# Altium PCB UltraSonicTestHarnessBoard.PcbDoc
Units mil, origin at the board's own origin, x right, y up, seen from the top; angles counter-clockwise.
Board outline 2704.96 x 3392.8 mil, 2 copper layers (Top Layer, Bottom Layer); 57 components, 26 nets, 86 pads, 77 vias.
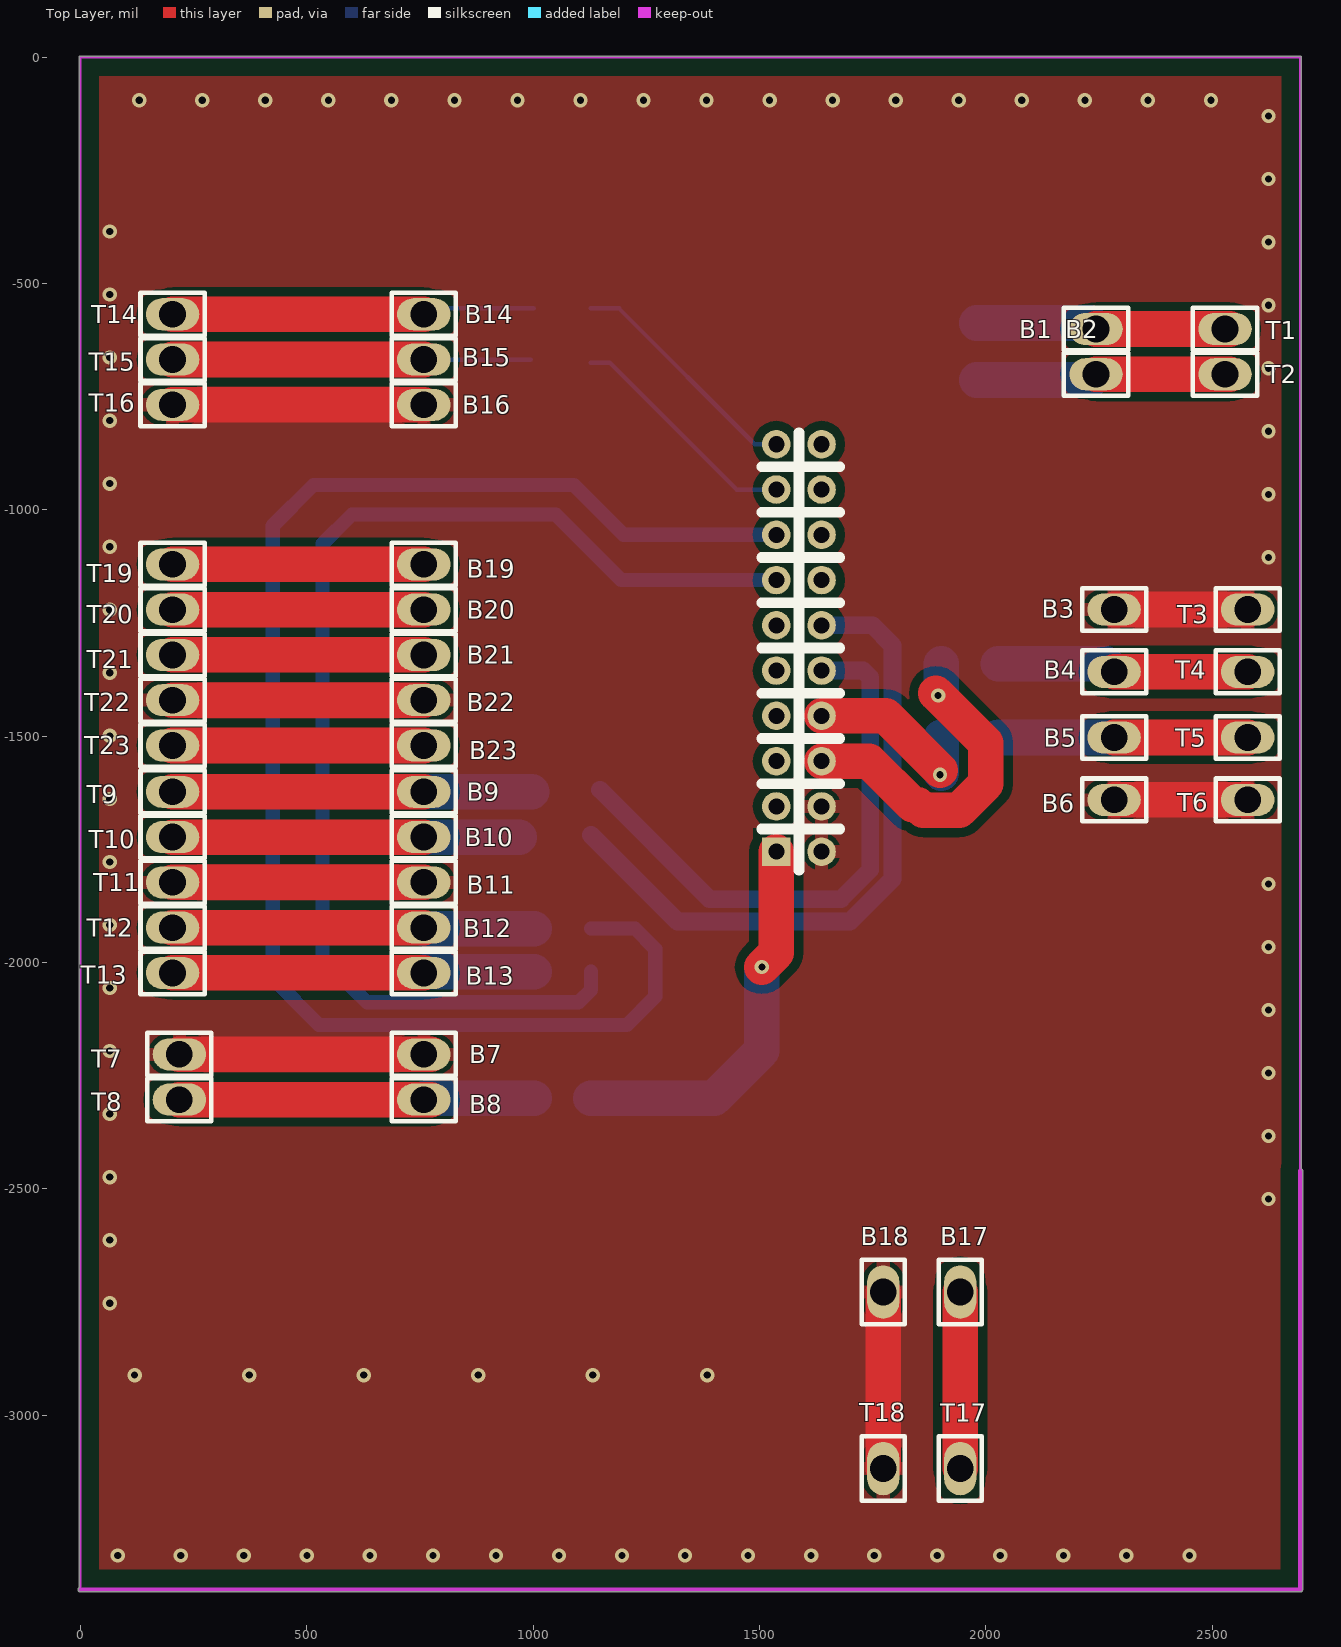
[diagram p0: Top Layer view]
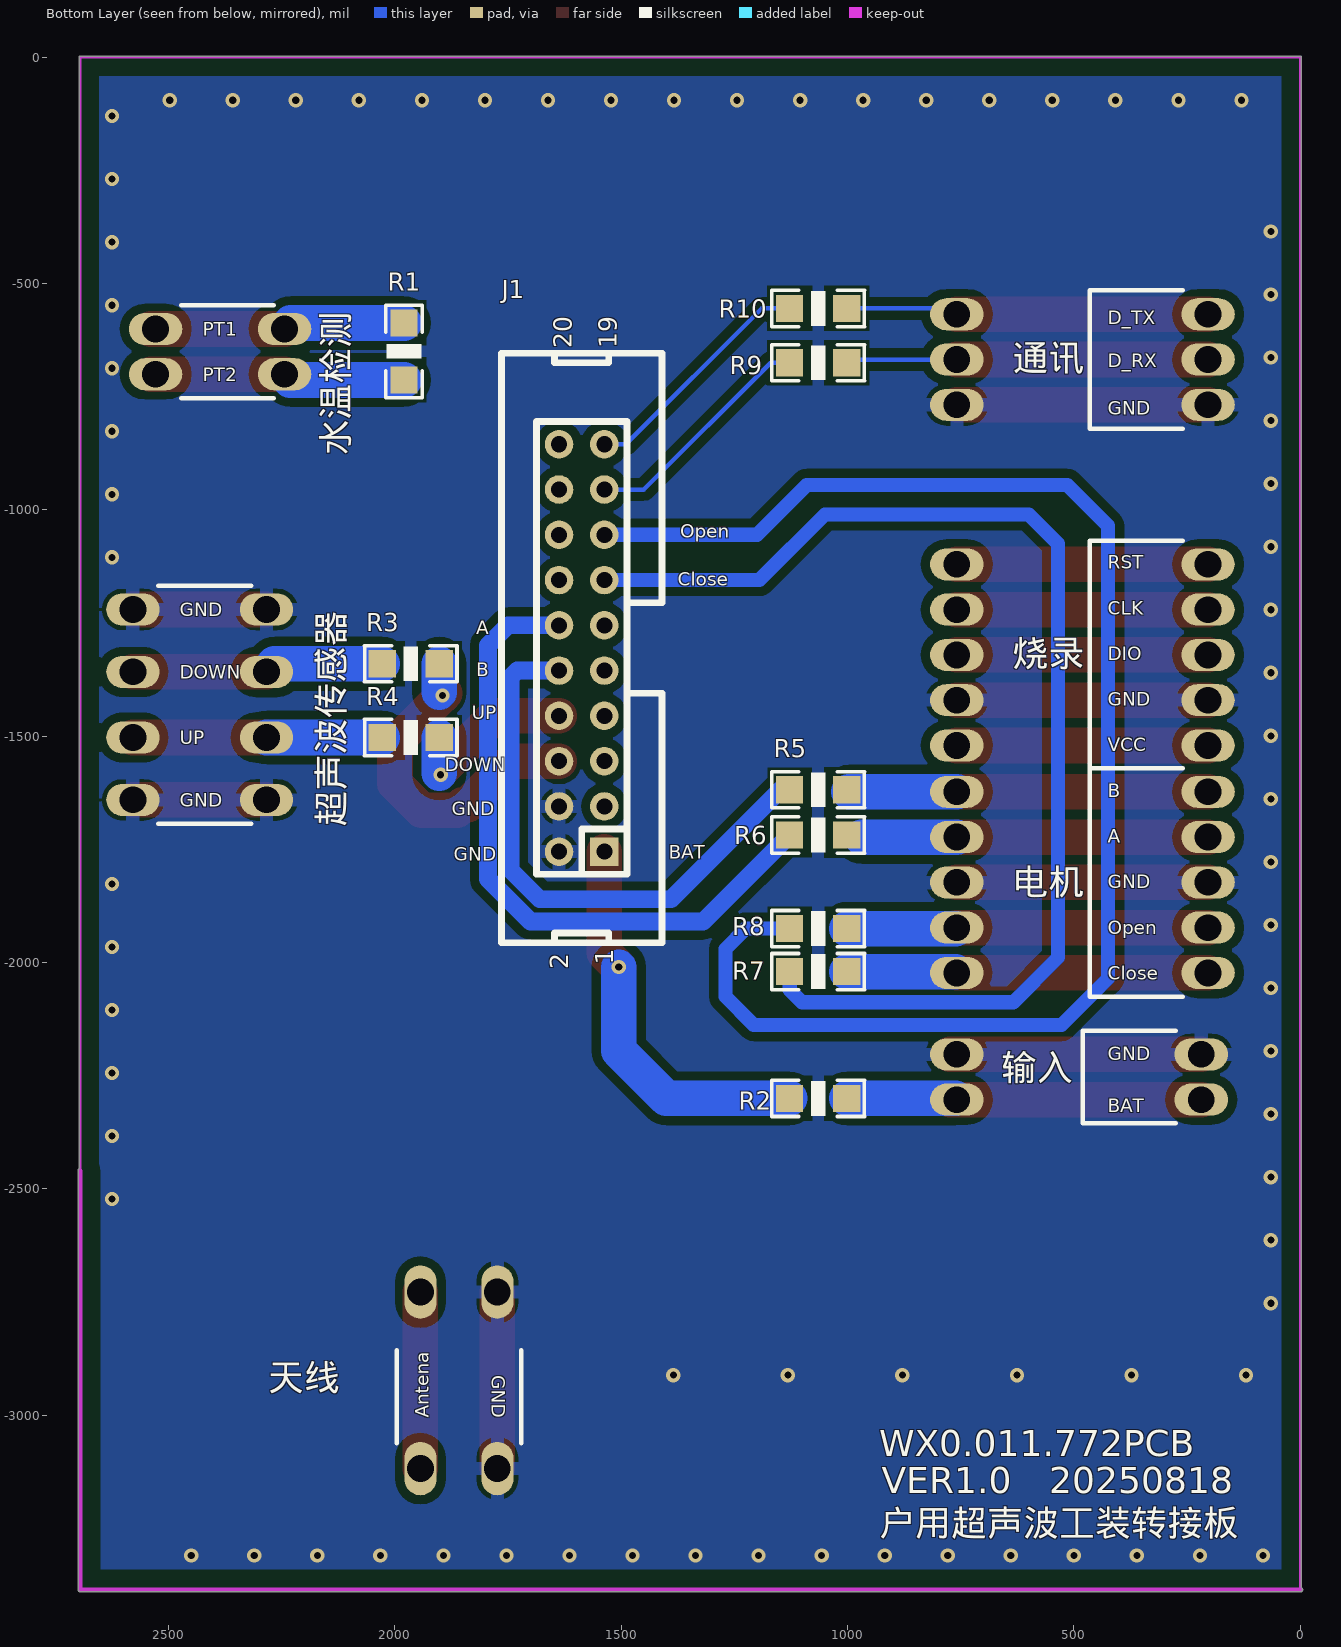
[diagram p1: Bottom Layer view, seen from below]
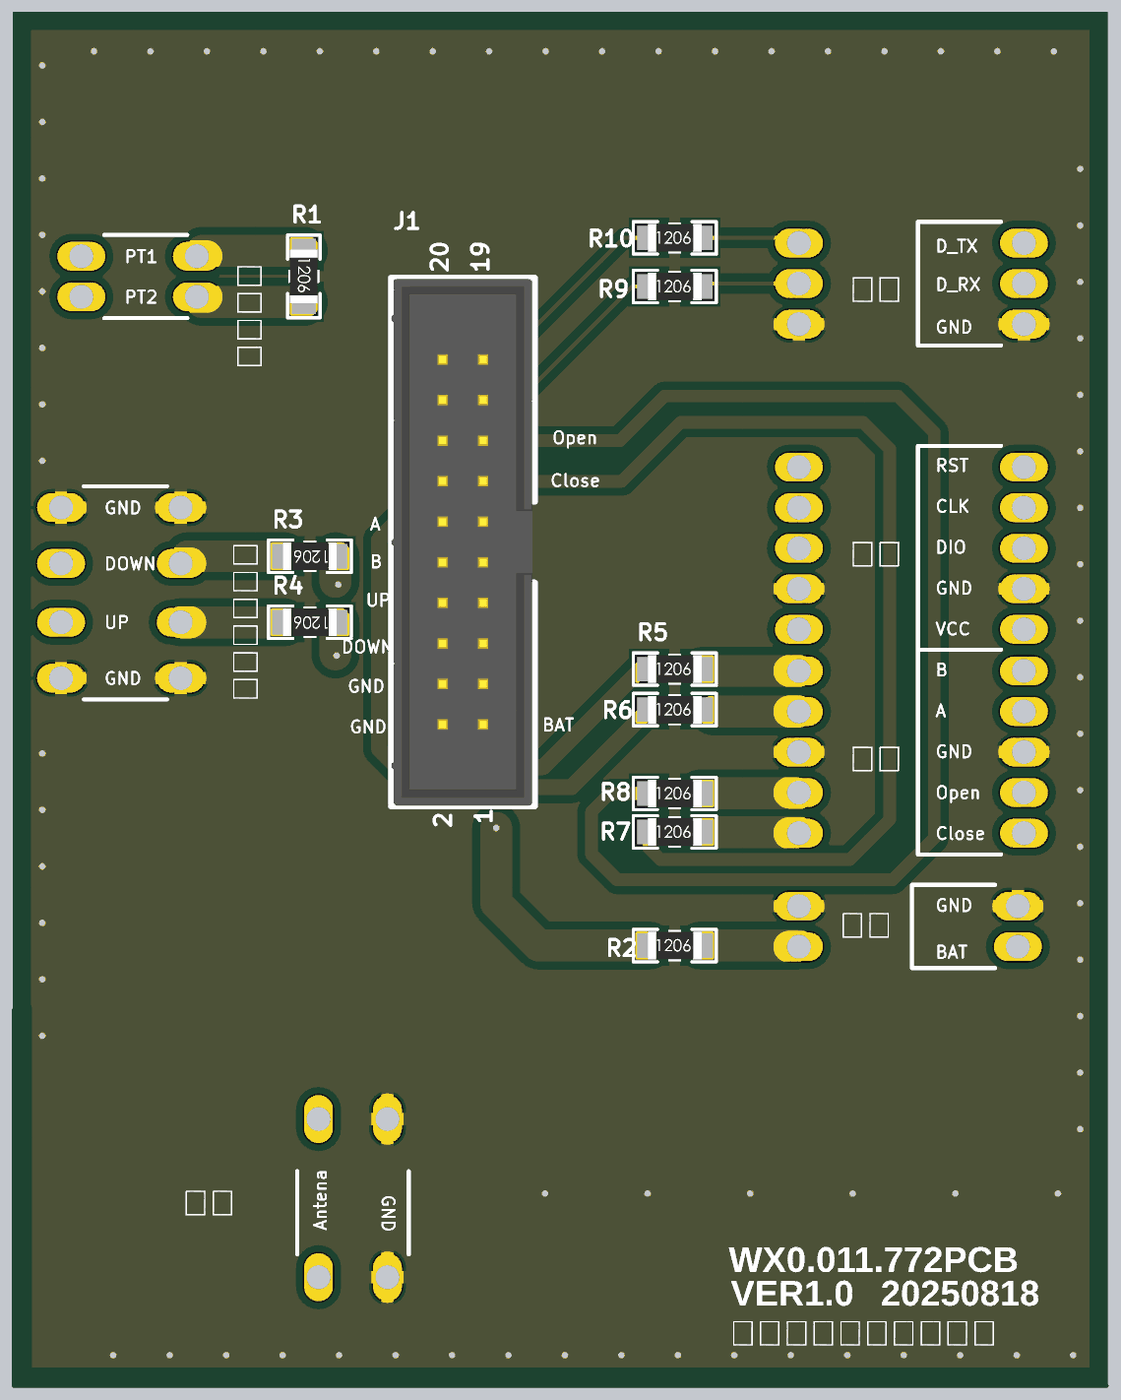
[diagram p2: 3D render of the assembled board from below, using the file's embedded part models]

## Layer stack, top to bottom
Top Solder: solder mask 0.4, Solder Resist, Dk 3.5
Top Layer: signal copper 1.4
Dielectric 1: dielectric 12.6, FR-4, Dk 4.8
Bottom Layer: signal copper 1.4
Bottom Solder: solder mask 0.4, Solder Resist, Dk 3.5

## Board outline
0,-3390.29 cw(c0,-3385.27) -2.52,-3380.94 -2.52,0 cw(c0,0) 0,2.52 2695,2.52 cw(c2695,0) 2697.51,0 cw(c2695,0) 2697.44,-0.59 2697.44,-2455.42 cw(c2694.93,-2459.76) 2699.94,-2459.76 2699.94,-3385.27 cw(c2694.93,-3385.27) 2694.93,-3390.29

## Design rules (kind name [scope] priority, off if disabled: settings)
Clearance Keepout_all [OnLayer('Keep-Out Layer')] p1: gap=39.37 ignorepadtopadclearanceinfootprint=FALSE
Clearance PolygonAll [InPolygon] p2: gap=19.68 ignorepadtopadclearanceinfootprint=FALSE
Clearance [All] p3: gap=10 ignorepadtopadclearanceinfootprint=FALSE except(0: Arc-Hole Track-Hole SMDPad-Hole THPad-Hole Via-Hole Fill-Hole Poly-Hole Region-Hole Text-Hole)
ComponentClearance [All] p1 off: gap=10 collisioncheckmode=3 verticalgap=10 showdistances=FALSE
Height [All] p1 off: minheight=0 maxheight=1000 prefheight=500
HoleSize [All] p1 off: absolutevalues=TRUE maxlimit=100 minlimit=1 maxpercent=80.000 minpercent=20.000
HoleToHoleClearance [All] p1 off: gap=10 allowstackedmicrovias=TRUE
LayerPairs [All] p1 off: enforce=TRUE
MinimumSolderMaskSliver [All] p1 off: minsoldermaskwidth=10
NetAntennae [All] p1 off: netantennaetolerance=0
PolygonConnect Via [isvia] p1: connectstyle=Direct reliefconductorwidth=10 reliefentries=4 polygonreliefangle="90 Angle" airgapwidth=10
PolygonConnect [All] p2: connectstyle=Relief reliefconductorwidth=30 reliefentries=4 polygonreliefangle="90 Angle" airgapwidth=10
RoutingVias [All] p1: holewidth=28 width=50 viastyle="Through Hole" minholewidth=28 minwidth=50 maxholewidth=28 maxwidth=50
SilkToSilkClearance [All] p1 off: silktosilkclearance=10
SilkToSolderMaskClearance [IsPad] p1 off: minsilkscreentomaskgap=10 clearancetoexposedcopper=TRUE
SolderMaskExpansion [All] p1: expansion=4
Width [All] p1: maxlimit=393.7 minlimit=10 preferedwidth=10
21 further rules are at their usual default settings.

## Components (designator, comment, footprint, x,y, rotation, side; value= is the part's Value field where it differs from the comment)
B1 "备用焊线" TestPoint 2243.74,-600.34 r90 top
B2 "备用焊线" TestPoint 2243.74,-700.34 r90 top
B3 "备用焊线" TestPoint 2283.71,-1220.01 r90 top
B4 "备用焊线" TestPoint 2283.71,-1357.8 r90 top
B5 "备用焊线" TestPoint 2283.71,-1502.8 r90 top
B6 "备用焊线" TestPoint 2283.71,-1640.6 r90 top
B7 "备用焊线" TestPoint 758.74,-2202.8 r90 top
B8 "备用焊线" TestPoint 758.74,-2302.8 r90 top
B9 "备用焊线" TestPoint 758.74,-1622.8 r90 top
B10 "备用焊线" TestPoint 758.74,-1722.8 r90 top
B11 "备用焊线" TestPoint 758.74,-1822.8 r90 top
B12 "备用焊线" TestPoint 758.74,-1922.8 r90 top
B13 "备用焊线" TestPoint 758.74,-2022.8 r90 top
B14 "备用焊线" TestPoint 758.74,-567.8 r90 top
B15 "备用焊线" TestPoint 758.74,-667.8 r90 top
B16 "备用焊线" TestPoint 758.74,-767.8 r90 top
B17 "备用焊线" TestPoint 1943.71,-2727.8 r0 top
B18 "备用焊线" TestPoint 1773.71,-2727.8 r180 top
B19 "备用焊线" TestPoint 758.74,-1120.34 r90 top
B20 "备用焊线" TestPoint 758.74,-1220.34 r90 top
B21 "备用焊线" TestPoint 758.74,-1320.34 r90 top
B22 "备用焊线" TestPoint 758.74,-1420.34 r90 top
B23 "备用焊线" TestPoint 758.74,-1520.34 r270 top
J1 "DC254_2*10" IDC2.54-LI-2x10P 1537.5,-1755 r90 bottom locked
R1 "10K" R-1206 1980,-650 r90 bottom
R2 "0R" R-1206 1065,-2300 r0 bottom
R3 "0R" R-1206 1965,-1340 r180 bottom
R4 "0R" R-1206 1965,-1502.8 r180 bottom
R5 "0R" R-1206 1065,-1618.3 r0 bottom
R6 "0R" R-1206 1065,-1718.24 r0 bottom
R7 "0R" R-1206 1065,-2020 r0 bottom
R8 "0R" R-1206 1065,-1925 r0 bottom
R9 "NC" R-1206 1065,-675 r0 bottom
R10 "NC" R-1206 1065,-555 r0 bottom
T1 "顶针" TestPoint 2528.74,-600.34 r90 top
T2 "顶针" TestPoint 2528.74,-700.34 r90 top
T3 "顶针" TestPoint 2578.71,-1220.01 r90 top
T4 "顶针" TestPoint 2578.71,-1357.8 r90 top
T5 "顶针" TestPoint 2578.71,-1502.8 r90 top
T6 "顶针" TestPoint 2578.71,-1640.6 r90 top
T7 "顶针" TestPoint 218.71,-2202.8 r90 top
T8 "顶针" TestPoint 218.71,-2302.8 r90 top
T9 "顶针" TestPoint 203.71,-1622.8 r90 top
T10 "顶针" TestPoint 203.71,-1722.8 r90 top
T11 "顶针" TestPoint 203.71,-1822.8 r90 top
T12 "顶针" TestPoint 203.71,-1922.8 r90 top
T13 "顶针" TestPoint 203.71,-2022.8 r90 top
T14 "顶针" TestPoint 203.71,-567.8 r90 top
T15 "顶针" TestPoint 203.71,-667.8 r270 top
T16 "顶针" TestPoint 203.71,-767.8 r90 top
T17 "顶针" TestPoint 1943.71,-3117.8 r0 top
T18 "顶针" TestPoint 1773.71,-3117.8 r180 top
T19 "顶针" TestPoint 203.74,-1120.34 r90 top
T20 "顶针" TestPoint 203.74,-1220.34 r90 top
T21 "顶针" TestPoint 203.74,-1320.34 r90 top
T22 "顶针" TestPoint 203.74,-1420.34 r90 top
T23 "顶针" TestPoint 203.74,-1520.34 r90 top

## Footprints (in the part's own frame and the unit in brackets; to place one, negate y for a bottom-side part, rotate by r counter-clockwise, add the part's x,y. Pads: shape width x height; smd on the part's side, far side on the other; paste and mask are expansions set on the pad)
IDC2.54-LI-2x10P [mm] "20P简易牛角座"
  rect 1.6x1.6 hole 0.9: 1(0,0)
  round 1.6 hole 0.9: 2(0,2.54) 3(2.54,0) 4(2.54,2.54) 5(5.08,0) 6(5.08,2.54) 7(7.62,0) 8(7.62,2.54) 9(10.16,0) 10(10.16,2.54) 11(12.7,0) 12(12.7,2.54) 13(15.24,0) 14(15.24,2.54) 15(17.78,0) 16(17.78,2.54) 17(20.32,0) 18(20.32,2.54) 19(22.86,0) 20(22.86,2.54)
  silkscreen extent -5.11,-3.23 27.97,5.77, body extent -5.08,-3.08 27.94,5.77, height 9.17
R-1206 [mil] "SMD ,RESISTOR,"
  rect 60x60 smd: 1(-62.99,0) 2(62.99,0)
  silkscreen extent -102,-40 102,40, body extent -66,-34 66,34, height 33
TestPoint [mm]
  oval 1.8x3 hole 1.5: 1(0,0)
  silkscreen extent -1.2,-1.8 1.2,1.8

## Part data
B1 B2 B3 B4 B5 B6 B7 B8 B9 B10 B11 B12 B13 B14 B15 B16 B17 B18 B19 B20 B21 B22 B23 T1 T2 T3 T4 T5 T6 T7 T8 T9 T10 T11 T12 T13 T14 T15 T16 T17 T18 T19 T20 T21 T22 T23: library part AD_WXHJ_TEST-POINT_01, "通孔测试点", Part Name=测?, ID=24, Part Number=AD_WXHJ_TEST-POINT_01, SMD/DIP=SMD
J1: library part 1010902-0139, "DC2 2.54mm 2x10pin,2.54mm间距，2x10pin，32×8.55×27.5mm,母头,双排,双排牛角座", Part Name=DCţ?, ID=4, Part Number=1010902-0139, SMD/DIP=DIP
R1 R2 R3 R4 R5 R6 R7 R8 R9 R10: library part 101010101-0013, "0Ω,±5%,1/4W,1206,国巨,RC1206JR-070RL", Part Name=1206贴?, ID=2, Part Number=101010101-0013, SMD/DIP=SMD

## Via types
v1: diameter 31.5, hole 15.75, Top Layer to Bottom Layer, tented both sides, 77 vias

## Nets (pads, with @x,y where several pads share a name; then routed paths per layer and width w, separated by ;. In a path a pad name is that pad's centre, name@x,y a point inside that pad or via, vN(x,y) a via of type N, cw(c..) or ccw(c..) an arc to the next point about the centre after c; other vN are vias at no path point)
3.6V_IN: J1.1 R2.2 | length 874.3
  Top Layer w78.74: v1(1505.5,-2010) 1537.5,-1978 J1.1
  Bottom Layer w78.74: R2.2 1400.56,-2300 1505.5,-2195.06 v1(1505.5,-2010)
A: B10.1 R6.1 T10.1 | length 765.5
  Top Layer w78.74: T10.1 B10.1
  Bottom Layer w78.74: B10.1 969.21,-1722.8
Analog_A: J1.6 R3.2 | length 740.4
  Top Layer w78.74: J1.6 1742.16,-1555 1838.85,-1651.69 1850.25,-1651.69 1862.3,-1663.74 1941.26,-1663.74 2000,-1605 2000,-1515.05 v1(1895,-1410.05) v1@1890,-1405.05
  Bottom Layer w78.74: v1@1902.01,-1403.04 R3.2
Analog_B: J1.8 R4.2 | length 390.5
  Top Layer w78.74: J1.8 1779.06,-1455 v1@1899.06,-1575
  Bottom Layer w78.74: v1@1902.01,-1582.05 R4.2
  other v1: 1899.06,-1585
Antena: B17.1 T17.1 | length 390
  Top Layer w78.74: T17.1 B17.1
B: B9.1 R5.1 T9.1 | length 793.8
  Top Layer w78.74: T9.1 B9.1
  Bottom Layer w78.74: B9.1 R5.1@997.5,-1622.8
BAT: B8.1 R2.1 T8.1 | length 795.5
  Top Layer w78.74: T8.1 B8.1 B8.1@773.74,-2302.8
  Bottom Layer w78.74: B8.1@761.54,-2300 R2.1
CLK: B20.1 T20.1 | length 555
  Top Layer w78.74: T20.1 B20.1
CLOSE: B13.1 R7.1 T13.1 | length 795.5
  Top Layer w78.74: T13.1 B13.1
  Bottom Layer w78.74: B13.1@761.54,-2020 R7.1
D_RX: B15.1 R9.1 T15.1 | length 791.1
  Top Layer w78.74: T15.1 B15.1
  Bottom Layer w10: B15.1 R9.1@994.81,-667.8
D_TX: B14.1 R10.1 T14.1 | length 785.5
  Top Layer w78.74: T14.1 B14.1
  Bottom Layer w10: B14.1@771.54,-555 R10.1
DIO: B21.1 T21.1 | length 555
  Top Layer w78.74: T21.1 B21.1
DOWN: B4.1 R3.1 T4.1 | length 532.9
  Top Layer w78.74: B4.1 T4.1
  Bottom Layer w78.74: R3.1 B4.1@2265.91,-1340
DRV+: J1.12 R6.2 | length 1475.8
  Bottom Layer w39.37: R6.2 1319.13,-1909.37 1700.45,-1909.37 1794.37,-1815.45 1794.37,-1299.37 1750,-1255 J1.12
DRV-: J1.10 R5.2 | length 1262.3
  Bottom Layer w39.37: R5.2@1148.3,-1618.3 1390,-1860 1680,-1860 1745,-1795 1745,-1370.34 1729.66,-1355 J1.10
GND: B3.1 B6.1 B7.1 B11.1 B16.1 B18.1 B22.1 J1.2 J1.4 T3.1 T6.1 T7.1 T11.1 T16.1 T18.1 T22.1 | length 3200.1
  Top Layer w78.74: T11.1 B11.1 ; T16.1 B16.1 ; T22.1 B22.1 ; T7.1 B7.1@773.74,-2202.8 ; T18.1 B18.1 ; B6.1 T6.1 ; B3.1 T3.1
  other v1: 82.46,-3310 221.73,-3310 361,-3310 500.26,-3310 639.53,-3310 778.8,-3310 918.07,-3310 1057.33,-3310 1196.6,-3310 1335.87,-3310 1475.13,-3310 1614.4,-3310 1753.67,-3310 1892.93,-3310 2032.2,-3310 2171.47,-3310 2310.73,-3310 2450,-3310 120,-2911.45 373,-2911.45 626,-2911.45 879,-2911.45 1132,-2911.45 1385,-2911.45 65,-2752.53 65,-2613.27 2625,-2522.53 65,-2474 2625,-2383.27 65,-2334.73 2625,-2244 65,-2195.47 2625,-2104.73 65,-2056.2 2625,-1965.47 65,-1916.93 2625,-1826.2 65,-1777.67 65,-1638.4 65,-1499.13 65,-1359.87 65,-1220.6 2625,-1104.87 65,-1081.33 2625,-965.6 65,-942.07 2625,-826.33 65,-802.8 2625,-687.07 65,-663.53 2625,-547.8 65,-524.27 2625,-408.53 65,-385 2625,-269.27 2625,-130 130,-95 269.27,-95 408.53,-95 547.8,-95 687.07,-95 826.33,-95 965.6,-95 1104.87,-95 1244.13,-95 1383.4,-95 1522.67,-95 1661.93,-95 1801.2,-95 1940.47,-95 2079.73,-95 2219,-95 2358.27,-95 2497.53,-95
NetJ1_13: J1.13 R7.2 | length 2757.6
  Bottom Layer w31.5: 1031.35,-2088.31 1100,-2088.31 1127.99,-2060.32 R7.2 ; 1099.61,-2087.92 633.99,-2087.92 535,-1988.93 535,-1075 600,-1010 1050,-1010 1195,-1155 J1.13
NetJ1_15: J1.15 R8.2 | length 3374.6
  Bottom Layer w31.5: R8.2 1225,-1925 1270,-1970 1270,-2075 1207.32,-2137.68 527.42,-2137.68 425,-2035.27 425,-1035 515,-945 1090,-945 1200,-1055 J1.15
NetJ1_17: J1.17 R9.2 | length 525.5
  Bottom Layer w10: R9.2 1170,-675 1450,-955 J1.17
NetJ1_19: J1.19 R10.2 | length 533.8
  Bottom Layer w10: R10.2 1190,-555 1490,-855 J1.19
OPEN: B12.1 R8.1 T12.1 | length 796.1
  Top Layer w78.74: T12.1 B12.1
  Bottom Layer w78.74: B12.1@760.94,-1925 R8.1
PT1: B1.1 R1.2 T1.1 | length 545.4
  Top Layer w78.74: B1.1 T1.1 T1.1@2538.74,-600.34
  Bottom Layer w78.74: R1.2 B1.1@2230.41,-587.01
PT2: B2.1 R1.1 T2.1 | length 546.1
  Top Layer w78.74: B2.1 T2.1 T2.1@2538.74,-700.34
  Bottom Layer w78.74: R1.1 B2.1@2231.09,-712.99
RST: B19.1 T19.1 | length 555
  Top Layer w78.74: T19.1 B19.1
UP: B5.1 R4.1 T5.1 | length 550.7
  Top Layer w78.74: B5.1 T5.1
  Bottom Layer w78.74: R4.1 B5.1
VCC: B23.1 T23.1 | length 555
  Top Layer w78.74: T23.1 B23.1
pads on no net: J1.3 J1.5 J1.7 J1.9 J1.11 J1.14 J1.16 J1.18 J1.20

## Polygon pours and split planes (outlines as drawn)
GND on Bottom Layer "ToplayerPolygon" (solid, remove dead copper, pour order 4): 0,-3390.29 cw(c0,-3385.27) -2.52,-3380.94 -2.52,0 cw(c0,0) 0,2.52 2695,2.52 cw(c2695,0) 2697.51,0 cw(c2695,0) 2697.44,-0.59 2697.44,-2455.42 cw(c2694.93,-2459.76) 2699.94,-2459.76 2699.94,-3385.27 cw(c2694.93,-3385.27) 2694.93,-3390.29
GND on Top Layer "ToplayerPolygon" (solid, remove dead copper, pour order 0): 0,-3390.29 cw(c0,-3385.27) -2.52,-3380.94 -2.52,0 cw(c0,0) 0,2.52 2695,2.52 cw(c2695,0) 2697.51,0 cw(c2695,0) 2697.44,-0.59 2697.44,-2455.42 cw(c2694.93,-2459.76) 2699.94,-2459.76 2699.94,-3385.27 cw(c2694.93,-3385.27) 2694.93,-3390.29

## Keep-outs
Keep-Out Layer:
  lines w5: 0,-3385.27 0,0 2695,0 ; 0,-2199.92 0,-2144.8 ; 0,-1373.15 0,-1318.03 ; 270.69,-3385.27 1071.87,-3385.27 ; 276.6,0 331.72,0 ; 2694.93,-562.54 2694.93,-2459.76 2694.93,0 ; 2694.93,-2199.92 2694.93,-2144.8 2694.93,-2199.92 ; 2694.93,-1373.15 2694.93,-1318.03 2694.93,-1373.15
  lines w10: 0,-3385.27 2694.93,-3385.27 2694.93,-2459.76

## Silkscreen, mask and mechanical layers (free items; w line width, h text height)
Bottom Overlay:
  lines w10: 260.06,-2075.33 465.06,-2075.33 465.06,-1570.27 260.06,-1570.27 ; 260.06,-820.33 465.06,-820.33 465.06,-515.27 260.06,-515.27 ; 260.1,-1067.81 465.1,-1067.81 465.1,-1570.24 ; 275.06,-2355.33 480.06,-2355.33 480.06,-2150.27 275.06,-2150.27 ; 1721.18,-3061.45 1721.18,-2856.45 ; 1996.24,-3061.45 1996.24,-2856.45 ; 2267.39,-752.87 2472.39,-752.87 ; 2267.39,-547.81 2472.39,-547.81 ; 2317.35,-1693.13 2522.35,-1693.13 ; 2317.35,-1167.48 2522.35,-1167.48
  text "D_TX" at 425.06,-589.46 h30
  text "PT1" at 2425.06,-615.27 h30
  text "D_RX" at 425.06,-684.46 h30
  text "通讯" at 635.03,-712.74 h100
  text "PT2" at 2425.06,-715.27 h30
  text "GND" at 425.06,-789.46 h30
  text "水温检测" at 2083.74,-880.34 h100 r270
  text "Open" at 1370.06,-1061.97 h30
  text "RST" at 425.06,-1130.34 h30
  text "Close" at 1375,-1167.58 h30
  text "CLK" at 425.06,-1231.17 h30
  text "GND" at 2475.03,-1234.94 h30
  text "A" at 1820,-1275 h30
  text "DIO" at 425.06,-1332 h30
  text "烧录" at 635.06,-1365.27 h100
  text "B" at 1820,-1367.58 h30
  text "DOWN" at 2475.03,-1372.74 h30
  text "GND" at 425.06,-1432.83 h30
  text "UP" at 1830.05,-1462.74 h30
  text "UP" at 2475.03,-1517.74 h30
  text "VCC" at 425.06,-1533.66 h30
  text "DOWN" at 1890.03,-1577.74 h30
  text "B" at 425.06,-1634.48 h30
  text "GND" at 2475.03,-1655.53 h30
  text "GND" at 1875,-1675 h30
  text "超声波传感器" at 2093.71,-1700.01 h100 r270
  text "A" at 425.06,-1735.31 h30
  text "BAT" at 1395.06,-1770.27 h30
  text "GND" at 1870,-1775 h30
  text "GND" at 425.06,-1836.14 h30
  text "电机" at 635.06,-1870.27 h100
  text "Open" at 425.06,-1936.97 h30
  text "Close" at 425.06,-2037.8 h30
  text "GND" at 425.06,-2215.27 h30
  text "输入" at 660.06,-2280.27 h100
  text "BAT" at 425.06,-2330.27 h30
  text "GND" at 1786.18,-2911.45 h30 r90
  text "天线" at 2280,-2965 h100
  text "Antena" at 1925.06,-3005.27 h30 r270
  text "WX0.011.772PCB" at 930,-3110 h100
  text "20250818" at 555,-3192.02 h100
  text "VER1.0" at 925,-3192.02 h100
  text "户用超声波工装转接板" at 930.01,-3286.29 h100
Mechanical 1:
  lines w5: 0.07,-3385.27 0.07,0 2695.07,0 ; 0.07,-2199.92 0.07,-2144.8 ; 0.07,-1373.15 0.07,-1318.03 ; 270.76,-3385.27 1071.94,-3385.27 ; 276.67,0 331.79,0 ; 2695,-562.54 2695,-2459.76 2695,0 ; 2695,-2199.92 2695,-2144.8 2695,-2199.92 ; 2695,-1373.15 2695,-1318.03 2695,-1373.15
  lines w10: 0.07,-3385.27 2695,-3385.27 2695,-2459.76
Mechanical 15:
  circle w10: c218.71,-2302.8 r35.9
  circle w10: c218.71,-2202.8 r35.9
  circle w10: c203.71,-2022.8 r35.9
  circle w10: c203.71,-1922.8 r35.9
  circle w10: c203.71,-1822.8 r35.9
  circle w10: c203.71,-1722.8 r35.9
  circle w10: c203.71,-1622.8 r35.9
  circle w10: c203.74,-1520.34 r35.9
  circle w10: c203.74,-1420.34 r35.9
  circle w10: c203.74,-1320.34 r35.9
  circle w10: c203.74,-1220.34 r35.9
  circle w10: c203.74,-1120.34 r35.9
  circle w10: c203.71,-767.8 r35.9
  circle w10: c203.71,-667.8 r35.9
  circle w10: c203.71,-567.8 r35.9
  circle w10: c2578.71,-1640.6 r35.9
  circle w10: c2578.71,-1502.8 r35.9
  circle w10: c2578.71,-1357.8 r35.9
  circle w10: c2578.71,-1220.01 r35.9
  circle w10: c1943.71,-3117.8 r35.9
  circle w10: c1773.71,-3117.8 r35.9
  circle w10: c2528.74,-700.34 r35.9
  circle w10: c2528.74,-600.34 r35.9

## Text inside footprints (layer, text, board x,y; h text height)
J1: Bottom Overlay "2" at 1617.5,-2015 h40 r270; Bottom Overlay "1" at 1517.5,-2005 h40 r270; Bottom Overlay "20" at 1609.5,-643 h40 r270; Bottom Overlay "19" at 1509.5,-643 h40 r270